# Altium PCB 03按键.PcbDoc (part 2 of 3)
Units mil, origin at the board's own origin, x right, y up, seen from the top; angles counter-clockwise.
Board outline 1673 x 1444 mil, 2 copper layers (Top Layer, Bottom Layer); 1 components, 7 nets, 11 pads, 20 vias.
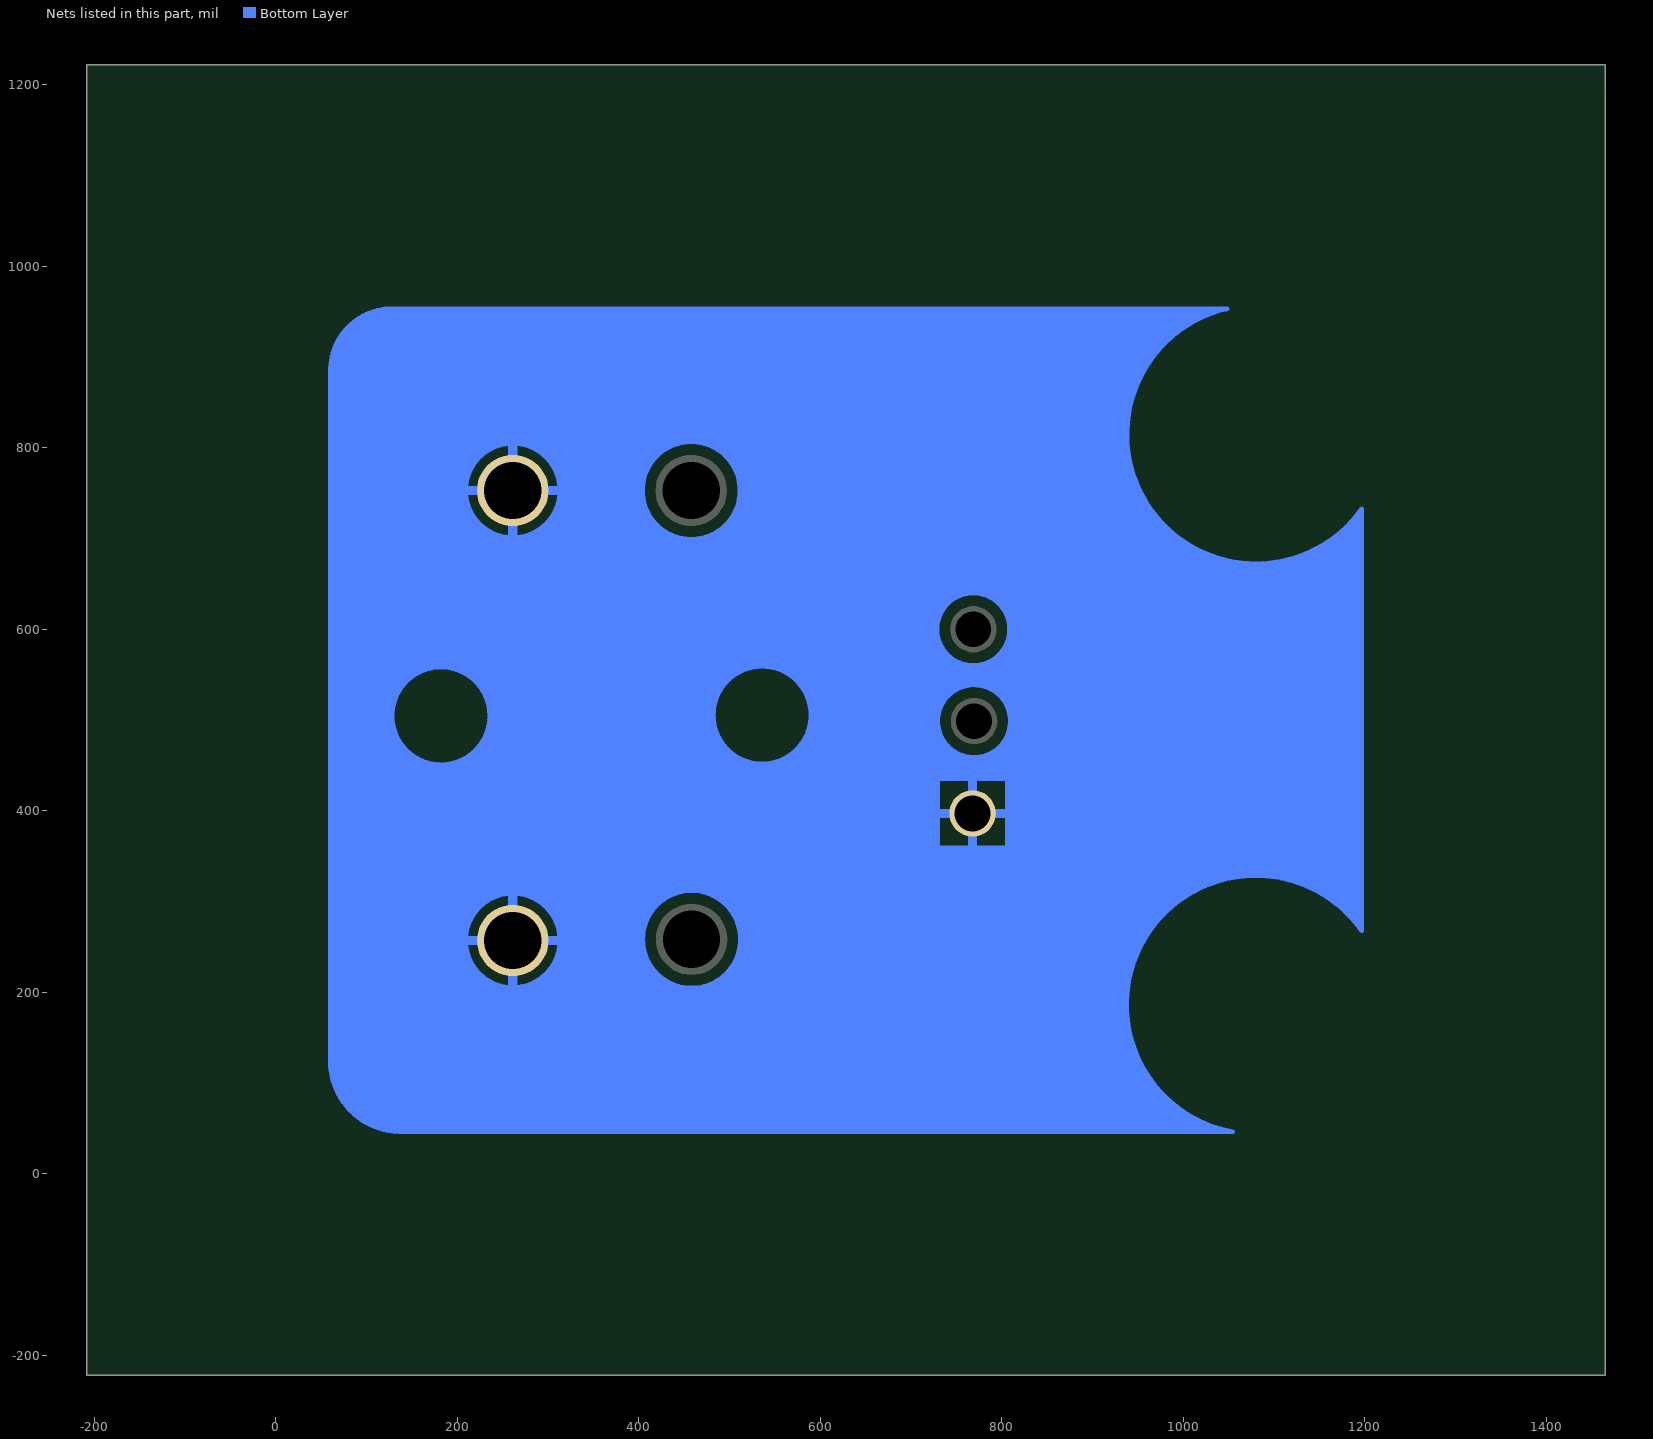
[diagram p2: the nets of this part, all layers, seen from the top]

## Via types
v1: diameter 40, hole 40, Top Layer to Bottom Layer, 16 vias
v2: diameter 255.91, hole 129.92, Top Layer to Bottom Layer, 2 vias
v3: diameter 78.74, hole 78.74, Top Layer to Bottom Layer, 2 vias

## Nets (pads, with @x,y where several pads share a name; then routed paths per layer and width w, separated by ;. In a path a pad name is that pad's centre, name@x,y a point inside that pad or via, vN(x,y) a via of type N, cw(c..) or ccw(c..) an arc to the next point about the centre after c; other vN are vias at no path point) (continued)
$Net0: (continued)
  Bottom Layer w5: 60.26,124.21 60.43,118.8 60.98,113.42 61.9,108.08 63.19,102.83 64.85,97.67 66.86,92.65 69.21,87.78 71.9,83.08 74.92,78.58 78.23,74.31 81.84,70.27 85.72,66.5 89.86,63.01 94.22,59.81 98.8,56.93 103.58,54.37 108.51,52.15 113.59,50.29 118.79,48.78 124.08,47.63 129.44,46.86 134.83,46.47 137.54,46.41 ; 60.26,124.68 60.26,885.37 ; 60.26,125.02 951.67,125.02 ; 60.26,129.02 949.83,129.02 ; 60.26,133.02 948.14,133.02 ; 60.26,137.02 946.59,137.02 ; 60.26,141.02 945.18,141.02 ; 60.26,145.02 943.9,145.02 ; 60.26,149.02 942.75,149.02 ; 60.26,153.02 941.73,153.02 ; 60.26,157.02 940.82,157.02 ; 60.26,161.02 940.04,161.02 ; 60.26,165.02 939.37,165.02 ; 60.26,169.02 938.82,169.02 ; 60.26,173.02 938.39,173.02 ; 60.26,177.02 938.07,177.02 ; 60.26,181.02 937.86,181.02 ; 60.26,185.02 937.77,185.02 ; 60.26,189.02 937.79,189.02 ; 60.26,193.02 937.92,193.02 ; 60.26,197.02 938.16,197.02 ; 60.26,201.02 938.52,201.02 ; 60.26,205.02 452.85,205.02 ; 60.26,209.02 242.03,209.02 ; 60.26,213.02 234.08,213.02 ; 60.26,217.02 228.46,217.02 ; 60.26,221.02 224.1,221.02 ; 60.26,225.02 220.59,225.02 ; 60.26,229.02 217.72,229.02 ; 60.26,233.02 215.38,233.02 ; 60.26,237.02 213.49,237.02 ; 60.26,241.02 211.99,241.02 ; 60.26,245.02 210.86,245.02 ; 60.26,249.02 210.06,249.02 ; 60.26,253.02 209.58,253.02 ; 60.26,257.02 209.41,257.02 ; 60.26,261.02 209.55,261.02 ; 60.26,265.02 210,265.02 ; 60.26,269.02 210.78,269.02 ; 60.26,273.02 211.88,273.02 ; 60.26,277.02 213.35,277.02 ; 60.26,281.02 215.21,281.02 ; 60.26,285.02 217.51,285.02 ; 60.26,289.02 220.33,289.02 ; 60.26,293.02 223.78,293.02 ; 60.26,297.02 228.06,297.02 ; 60.26,301.02 233.55,301.02 ; 60.26,305.02 241.22,305.02 ; 60.26,309.02 259.32,309.02 ; 60.26,313.02 1015.23,313.02 ; 60.26,317.02 1023.73,317.02 ; 60.26,321.02 1034.12,321.02 ; 60.26,325.02 1048.18,325.02 ; 60.26,329.02 1196.66,329.02 ; 60.26,333.02 1196.66,333.02 ; 60.26,337.02 1196.66,337.02 ; 60.26,341.02 1196.66,341.02 ; 60.26,345.02 1196.66,345.02 ; 60.26,349.02 1196.66,349.02 ; 60.26,353.02 1196.66,353.02 ; 60.26,357.02 1196.66,357.02 ; 60.26,361.02 729.86,361.02 ; 60.26,365.02 729.86,365.02 ; 60.26,369.02 729.86,369.02 ; 60.26,373.02 729.86,373.02 ; 60.26,377.02 729.86,377.02 ; 60.26,381.02 729.86,381.02 ; 60.26,385.02 729.86,385.02 ; 60.26,389.02 729.86,389.02 ; 60.26,393.02 729.86,393.02 ; 60.26,397.02 729.86,397.02 ; 60.26,401.02 729.86,401.02 ; 60.26,405.02 729.86,405.02 ; 60.26,409.02 729.86,409.02 ; 60.26,413.02 729.86,413.02 ; 60.26,417.02 729.86,417.02 ; 60.26,421.02 729.86,421.02 ; 60.26,425.02 729.86,425.02 ; 60.26,429.02 729.86,429.02 ; 60.26,433.02 729.86,433.02 ; 60.26,437.02 1196.66,437.02 ; 60.26,441.02 1196.66,441.02 ; 60.26,445.02 1196.66,445.02 ; 60.26,449.02 1196.66,449.02 ; 60.26,453.02 167.55,453.02 ; 60.26,457.02 157.42,457.02 ; 60.26,461.02 150.89,461.02 ; 60.26,465.02 145.94,465.02 ; 60.26,469.02 141.99,469.02 ; 60.26,473.02 138.77,473.02 ; 60.26,477.02 136.11,477.02 ; 60.26,481.02 133.93,481.02 ; 60.26,485.02 132.16,485.02 ; 60.26,489.02 130.77,489.02 ; 60.26,493.02 129.71,493.02 ; 60.26,497.02 128.98,497.02 ; 60.26,501.02 128.56,501.02 ; 60.26,505.02 128.43,505.02 ; 60.26,509.02 128.61,509.02 ; 60.26,513.02 129.08,513.02 ; 60.26,517.02 129.87,517.02 ; 60.26,521.02 130.98,521.02 ; 60.26,525.02 132.43,525.02 ; 60.26,529.02 134.26,529.02 ; 60.26,533.02 136.52,533.02 ; 60.26,537.02 139.26,537.02 ; 60.26,541.02 142.59,541.02 ; 60.26,545.02 146.69,545.02 ; 60.26,549.02 151.84,549.02 ; 60.26,553.02 158.75,553.02 ; 60.26,557.02 170.16,557.02 ; 60.26,561.02 760.74,561.02 ; 60.26,565.02 749.77,565.02 ; 60.26,569.02 743.76,569.02 ; 60.26,573.02 739.48,573.02 ; 60.26,577.02 736.23,577.02 ; 60.26,581.02 733.74,581.02 ; 60.26,585.02 731.84,585.02 ; 60.26,589.02 730.45,589.02 ; 60.26,593.02 729.51,593.02 ; 60.26,597.02 729,597.02 ; 60.26,601.02 728.89,601.02 ; 60.26,605.02 729.18,605.02 ; 60.26,609.02 729.89,609.02 ; 60.26,613.02 731.03,613.02 ; 60.26,617.02 732.64,617.02 ; 60.26,621.02 734.8,621.02 ; 60.26,625.02 737.61,625.02 ; 60.26,629.02 741.28,629.02 ; 60.26,633.02 746.23,633.02 ; 60.26,637.02 753.64,637.02 ; 60.26,641.02 1196.66,641.02 ; 60.26,645.02 1196.66,645.02 ; 60.26,649.02 1196.66,649.02 ; 60.26,653.02 1196.66,653.02 ; 60.26,657.02 1196.66,657.02 ; 60.26,661.02 1196.66,661.02 ; 60.26,665.02 1196.66,665.02 ; 60.26,669.02 1196.66,669.02 ; 60.26,673.02 1067.32,673.02 ; 60.26,677.02 1044.53,677.02 ; 60.26,681.02 1031.71,681.02 ; 60.26,685.02 1021.89,685.02 ; 60.26,689.02 1013.73,689.02 ; 60.26,693.02 1006.69,693.02 ; 60.26,697.02 1000.46,697.02 ; 60.26,701.02 444.55,701.02 ; 60.26,705.02 241.59,705.02 ; 60.26,709.02 233.79,709.02 ; 60.26,713.02 228.24,713.02 ; 60.26,717.02 223.92,717.02 ; 60.26,721.02 220.44,721.02 ; 60.26,725.02 217.6,725.02 ; 60.26,729.02 215.28,729.02 ; 60.26,733.02 213.41,733.02 ; 60.26,737.02 211.92,737.02 ; 60.26,741.02 210.8,741.02 ; 60.26,745.02 210.02,745.02 ; 60.26,749.02 209.55,749.02 ; 60.26,753.02 209.4,753.02 ; 60.26,757.02 209.55,757.02 ; 60.26,761.02 210.02,761.02 ; 60.26,765.02 210.81,765.02 ; 60.26,769.02 211.93,769.02 ; 60.26,773.02 213.41,773.02 ; 60.26,777.02 215.29,777.02 ; 60.26,781.02 217.61,781.02 ; 60.26,785.02 220.45,785.02 ; 60.26,789.02 223.93,789.02 ; 60.26,793.02 228.26,793.02 ; 60.26,797.02 233.81,797.02 ; 60.26,801.02 241.63,801.02 ; 60.26,805.02 444.69,805.02 ; 60.26,809.02 938.28,809.02 ; 60.26,813.02 938.18,813.02 ; 60.26,817.02 938.19,817.02 ; 60.26,821.02 938.31,821.02 ; 60.26,825.02 938.55,825.02 ; 60.26,829.02 938.9,829.02 ; 60.26,833.02 939.36,833.02 ; 60.26,837.02 939.94,837.02 ; 60.26,841.02 940.63,841.02 ; 60.26,845.02 941.44,845.02 ; 60.26,849.02 942.38,849.02 ; 60.26,853.02 943.44,853.02 ; 60.26,857.02 944.62,857.02 ; 60.26,861.02 945.93,861.02 ; 60.26,865.02 947.38,865.02 ; 60.26,869.02 948.96,869.02 ; 60.26,873.02 950.68,873.02 ; 60.26,877.02 952.56,877.02 ; 60.26,881.02 954.59,881.02 ; 60.26,885.02 956.78,885.02 ; 60.26,885.59 60.27,886.81 60.54,891.55 61.13,896.26 62.06,900.92 63.3,905.51 64.87,909.99 66.74,914.36 68.91,918.58 71.38,922.65 74.12,926.53 77.12,930.21 80.37,933.67 83.86,936.9 87.56,939.88 91.47,942.59 95.55,945.02 ; 60.32,121.02 953.66,121.02 ; 60.36,889.02 959.14,889.02 ; 60.57,117.02 955.81,117.02 ; 60.69,893.02 961.69,893.02 ; 61.04,113.02 958.13,113.02 ; 61.26,897.02 964.42,897.02 ; 61.71,109.02 960.62,109.02 ; 62.08,901.02 967.37,901.02 ; 62.61,105.02 963.31,105.02 ; 63.16,905.02 970.54,905.02 ; 63.73,101.02 966.21,101.02 ; 63.95,100.33 63.95,907.47 ; 64.5,909.02 973.95,909.02 ; 65.09,97.02 969.32,97.02 ; 66.13,913.02 977.64,913.02 ; 66.7,93.02 972.67,93.02 ; 67.95,90.3 67.95,916.79 ; 68.07,917.02 981.62,917.02 ; 68.58,89.02 976.28,89.02 ; 70.34,921.02 985.93,921.02 ; 70.74,85.02 980.19,85.02 ; 71.94,83.02 71.94,923.5 ; 73,925.02 990.64,925.02 ; 73.23,81.02 984.42,81.02 ; 75.94,77.19 75.94,928.83 ; 76.08,77.02 989.02,77.02 ; 76.1,929.02 995.79,929.02 ; 79.33,73.02 994.05,73.02 ; 79.72,933.02 1001.48,933.02 ; 79.94,72.33 79.94,933.25 ; 83.08,69.02 999.6,69.02 ; 83.94,68.17 83.94,936.98 ; 84,937.02 1007.83,937.02 ; 87.41,65.02 1005.77,65.02 ; 87.94,64.56 87.94,940.16 ; 89.14,941.02 1015.04,941.02 ; 91.94,61.42 91.94,942.89 ; 92.5,61.02 1012.74,61.02 ; 95.95,58.68 95.95,945.24 ; 98.65,57.02 1020.79,57.02 ; 99.95,56.28 99.95,947.23 ; 103.95,54.19 103.95,948.92 ; 104.22,949.02 1033.63,949.02 ; 106.48,53.02 1030.45,53.02 ; 107.95,52.39 107.95,950.31 ; 111.95,50.85 111.95,951.43 ; 115.94,49.56 115.94,952.3 ; 117.86,49.02 1042.95,49.02 ; 119.94,48.5 119.94,952.91 ; 120.86,953.02 1047.26,953.02 ; 123.94,47.66 123.94,953.29 ; 127.39,953.42 122.64,953.19 117.93,952.63 113.26,951.74 108.67,950.53 104.17,949 99.79,947.16 95.55,945.02 ; 127.95,47.04 127.95,953.4 ; 128.32,953.4 1048.88,953.4 1039.28,950.86 1029.88,947.66 1020.73,943.81 1011.87,939.33 1003.34,934.24 995.19,928.57 987.45,922.35 980.17,915.6 973.37,908.36 967.1,900.66 961.37,892.54 956.23,884.05 951.7,875.21 947.79,866.09 944.52,856.71 941.92,847.12 940,837.38 938.76,827.53 938.21,817.62 938.35,807.69 939.18,797.79 940.7,787.98 942.91,778.3 945.78,768.79 949.31,759.51 953.48,750.5 958.26,741.8 963.64,733.45 969.59,725.5 976.08,717.99 983.08,710.94 990.56,704.41 998.47,698.4 1006.78,692.97 1015.45,688.13 1024.43,683.9 1033.69,680.31 1043.18,677.38 1052.85,675.12 1062.65,673.53 1072.54,672.63 1082.47,672.43 1092.39,672.92 1102.25,674.1 1112,675.96 1121.6,678.5 1131,681.7 1140.15,685.55 1149.01,690.03 1157.54,695.12 1165.69,700.79 1173.43,707.01 1180.71,713.76 1187.51,721 ; 131.94,46.63 131.94,485.58 ; 131.94,523.79 131.94,953.4 ; 135.95,46.43 135.95,477.3 ; 135.95,532.08 135.95,953.4 ; 137.8,46.41 1054.49,46.41 1052.72,46.75 1043.05,49 1033.56,51.91 1024.29,55.48 1015.29,59.69 1006.62,64.51 998.29,69.93 990.37,75.92 982.89,82.44 975.87,89.47 969.37,96.97 963.4,104.91 958,113.24 953.2,121.93 949.01,130.94 945.46,140.21 942.57,149.71 940.35,159.39 938.81,169.2 937.95,179.09 937.79,189.02 ; 139.95,46.41 139.95,471.47 ; 139.95,537.91 139.95,953.4 ; 143.94,46.41 143.94,466.94 ; 143.94,542.43 143.94,953.4 ; 147.95,46.41 147.95,463.28 ; 147.95,546.09 147.95,953.4 ; 151.94,46.41 151.94,460.28 ; 151.94,549.09 151.94,953.4 ; 155.95,46.41 155.95,457.81 ; 155.95,551.56 155.95,953.4 ; 159.94,46.41 159.94,455.8 ; 159.94,553.58 159.94,953.4 ; 163.95,46.41 163.95,454.17 ; 163.95,555.2 163.95,953.4 ; 167.94,46.41 167.94,452.91 ; 167.94,556.46 167.94,953.4 ; 171.95,46.41 171.95,451.98 ; 171.95,557.39 171.95,953.4 ; 175.94,46.41 175.94,451.36 ; 175.94,558.01 175.94,953.4 ; 179.95,46.41 179.95,451.05 ; 179.95,558.32 179.95,953.4 ; 183.95,46.41 183.95,451.04 ; 183.95,558.34 183.95,953.4 ; 187.94,46.41 187.94,451.32 ; 187.94,558.05 187.94,953.4 ; 191.95,46.41 191.95,451.91 ; 191.95,557.46 191.95,953.4 ; 194.07,557.02 520.99,557.02 ; 195.94,46.41 195.94,452.82 ; 195.94,556.55 195.94,953.4 ; 196.68,453.02 524.79,453.02 ; 199.95,46.41 199.95,454.05 ; 199.95,555.32 199.95,953.4 ; 203.94,46.41 203.94,455.64 ; 203.94,553.73 203.94,953.4 ; 205.47,553.02 511.1,553.02 ; 206.8,457.02 513.02,457.02 ; 207.95,46.41 207.95,457.63 ; 207.95,551.74 207.95,953.4 ; 211.94,46.41 211.94,241.16 ; 211.94,273.21 211.94,460.06 ; 211.94,549.31 211.94,736.96 ; 211.94,769.06 211.94,953.4 ; 212.38,549.02 504.64,549.02 ; 213.34,461.02 506.02,461.02 ; 215.95,46.41 215.95,231.98 ; 215.95,282.39 215.95,463.01 ; 215.95,546.36 215.95,727.79 ; 215.95,778.23 215.95,953.4 ; 217.54,545.02 499.74,545.02 ; 218.28,465.02 500.82,465.02 ; 219.94,46.41 219.94,225.85 ; 219.94,288.52 219.94,466.6 ; 219.94,542.77 219.94,721.66 ; 219.94,784.36 219.94,953.4 ; 221.63,541.02 495.82,541.02 ; 222.23,469.02 496.69,469.02 ; 223.95,46.41 223.95,221.18 ; 223.95,471.05 223.95,293.2 ; 223.95,538.33 223.95,716.99 ; 223.95,953.4 223.95,789.03 ; 224.96,537.02 492.62,537.02 ; 225.46,473.02 493.33,473.02 ; 227.71,533.02 489.98,533.02 ; 227.94,46.41 227.94,217.45 ; 227.94,296.93 227.94,476.74 ; 227.94,532.63 227.94,713.26 ; 227.94,792.76 227.94,953.4 ; 228.11,477.02 490.57,477.02 ; 229.96,529.02 487.81,529.02 ; 230.29,481.02 488.3,481.02 ; 231.79,525.02 486.06,525.02 ; 231.94,46.41 231.94,214.41 ; 231.94,299.96 231.94,484.73 ; 231.94,524.64 231.94,710.22 ; 231.94,795.8 231.94,953.4 ; 232.06,485.02 486.45,485.02 ; 233.25,521.02 484.68,521.02 ; 233.46,489.02 484.98,489.02 ; 234.36,517.02 483.64,517.02 ; 234.51,493.02 483.86,493.02 ; 235.14,513.02 482.92,513.02 ; 235.24,497.02 483.06,497.02 ; 235.62,509.02 482.5,509.02 ; 235.67,501.02 482.58,501.02 ; 235.79,505.02 482.39,505.02 ; 235.95,46.41 235.95,211.92 ; 235.95,302.45 235.95,707.74 ; 235.95,798.28 235.95,953.4 ; 239.94,46.41 239.94,209.91 ; 239.94,304.47 239.94,705.73 ; 239.94,800.29 239.94,953.4 ; 243.95,46.41 243.95,208.3 ; 243.95,306.07 243.95,704.12 ; 243.95,801.9 243.95,953.4 ; 247.94,46.41 247.94,207.06 ; 247.94,307.31 247.94,702.88 ; 247.94,803.14 247.94,953.4 ; 251.94,46.41 251.94,206.16 ; 251.94,308.21 251.94,701.99 ; 251.94,804.04 251.94,953.4 ; 255.94,46.41 255.94,205.59 ; 255.94,308.78 255.94,701.41 ; 255.94,804.61 255.94,953.4 ; 259.95,46.41 259.95,205.33 ; 259.95,309.04 259.95,701.16 ; 259.95,804.86 259.95,953.4 ; 263.24,309.02 440.44,309.02 ; 263.95,46.41 263.95,205.38 ; 263.95,308.99 263.95,701.21 ; 263.95,804.81 263.95,953.4 ; 267.94,46.41 267.94,205.75 ; 267.94,308.63 267.94,701.57 ; 267.94,804.45 267.94,953.4 ; 271.94,46.41 271.94,206.42 ; 271.94,307.95 271.94,702.25 ; 271.94,803.77 271.94,953.4 ; 275.95,46.41 275.95,207.43 ; 275.95,306.94 275.95,703.26 ; 275.95,802.76 275.95,953.4 ; 279.94,46.41 279.94,208.79 ; 279.94,305.58 279.94,704.62 ; 279.94,801.4 279.94,953.4 ; 280.53,209.02 437.35,209.02 ; 280.91,801.02 433.95,801.02 ; 280.95,705.02 433.87,705.02 ; 281.34,305.02 431.72,305.02 ; 283.94,46.41 283.94,210.53 ; 283.94,303.84 283.94,706.36 ; 283.94,799.66 283.94,953.4 ; 287.95,46.41 287.95,212.7 ; 287.95,301.68 287.95,708.53 ; 287.95,797.5 287.95,953.4 ; 288.48,213.02 429.71,213.02 ; 288.72,797.02 427.22,797.02 ; 288.75,709.02 427.17,709.02 ; 289.01,301.02 425.7,301.02 ; 291.95,46.41 291.95,215.35 ; 291.95,299.02 291.95,711.18 ; 291.95,794.84 291.95,953.4 ; 294.1,217.02 424.19,217.02 ; 294.3,713.02 422.13,713.02 ; 294.28,793.02 422.17,793.02 ; 294.5,297.02 421.06,297.02 ; 295.94,46.41 295.94,218.6 ; 295.94,295.77 295.94,714.43 ; 295.94,791.59 295.94,953.4 ; 298.46,221.02 419.85,221.02 ; 298.6,789.02 418.14,789.02 ; 298.78,293.02 417.32,293.02 ; 299.94,46.41 299.94,222.61 ; 299.94,291.76 299.94,718.45 ; 299.94,787.57 299.94,953.4 ; 301.97,225.02 416.33,225.02 ; 302.1,721.02 414.83,721.02 ; 302.09,785.02 414.86,785.02 ; 302.23,289.02 414.26,289.02 ; 303.95,46.41 303.95,227.69 ; 303.95,286.68 303.95,723.53 ; 303.95,782.49 303.95,953.4 ; 304.83,229.02 413.44,229.02 ; 304.94,725.02 412.13,725.02 ; 304.93,781.02 412.16,781.02 ; 305.05,285.02 411.73,285.02 ; 307.18,233.02 411.07,233.02 ; 307.26,729.02 409.92,729.02 ; 307.25,777.02 409.94,777.02 ; 307.35,281.02 409.67,281.02 ; 307.95,46.41 307.95,234.54 ; 307.95,279.83 307.95,730.39 ; 307.95,775.63 307.95,953.4 ; 309.07,237.02 409.13,237.02 ; 309.13,733.02 408.12,733.02 ; 309.13,773.02 408.14,773.02 ; 309.21,277.02 408.01,277.02 ; 310.56,241.02 407.58,241.02 ; 310.61,737.02 406.7,737.02 ; 310.61,769.02 406.71,769.02 ; 310.67,273.02 406.7,273.02 ; 311.7,245.02 406.38,245.02 ; 311.73,741.02 405.62,741.02 ; 311.73,765.02 405.63,765.02 ; 311.78,269.02 405.74,269.02 ; 311.94,46.41 311.94,246.08 ; 311.94,268.3 311.94,741.94 ; 311.94,764.08 311.94,953.4 ; 312.5,249.02 405.51,249.02 ; 312.52,745.02 404.86,745.02 ; 312.52,761.02 404.87,761.02 ; 312.55,265.02 405.09,265.02 ; 312.98,253.02 404.95,253.02 ; 313.01,261.02 404.74,261.02 ; 312.99,749.02 404.41,749.02 ; 312.98,757.02 404.41,757.02 ; 313.15,257.02 404.7,257.02 ; 315.94,46.41 315.94,953.4 ; 319.95,46.41 319.95,953.4 ; 323.94,46.41 323.94,953.4 ; 327.94,46.41 327.94,953.4 ; 331.95,46.41 331.95,953.4 ; 335.95,46.41 335.95,953.4 ; 339.94,46.41 339.94,953.4 ; 343.94,46.41 343.94,953.4 ; 347.95,46.41 347.95,953.4 ; 351.95,46.41 351.95,953.4 ; 355.94,46.41 355.94,953.4 ; 359.94,46.41 359.94,953.4 ; 363.95,46.41 363.95,953.4 ; 367.94,46.41 367.94,953.4 ; 371.94,46.41 371.94,953.4 ; 375.95,46.41 375.95,953.4 ; 379.95,46.41 379.95,953.4 ; 383.94,46.41 383.94,953.4 ; 387.94,46.41 387.94,953.4 ; 391.95,46.41 391.95,953.4 ; 395.95,46.41 395.95,953.4 ; 399.94,46.41 399.94,953.4 ; 403.94,46.41 403.94,953.4 ; 407.95,46.41 407.95,239.98 ; 407.95,276.85 407.95,733.47 ; 407.95,772.54 407.95,953.4 ; 411.94,46.41 411.94,231.45 ; 411.94,285.38 411.94,725.33 ; 411.94,780.67 411.94,953.4 ; 415.94,46.41 415.94,225.51 ; 415.94,291.32 415.94,719.57 ; 415.94,786.43 415.94,953.4 ; 418.11,717.02 298.62,717.02 ; 419.95,46.41 419.95,220.92 ; 419.95,295.91 419.95,715.09 ; 419.95,790.92 419.95,953.4 ; 423.95,46.41 423.95,217.22 ; 423.95,299.61 423.95,711.46 ; 423.95,794.54 423.95,953.4 ; 427.94,46.41 427.94,214.18 ; 427.94,302.65 427.94,708.49 ; 427.94,953.4 427.94,797.52 ; 431.94,46.41 431.94,211.69 ; 431.94,305.15 431.94,706.04 ; 431.94,799.97 431.94,953.4 ; 435.95,46.41 435.95,209.64 ; 435.95,307.19 435.95,704.03 ; 435.95,801.97 435.95,953.4 ; 439.95,46.41 439.95,207.99 ; 439.95,308.84 439.95,702.43 ; 439.95,803.57 439.95,953.4 ; 443.94,46.41 443.94,206.71 ; 443.94,310.13 443.94,701.18 ; 443.94,804.82 443.94,953.4 ; 447.94,46.41 447.94,205.76 ; 447.94,311.08 447.94,700.26 ; 447.94,805.74 447.94,953.4 ; 451.95,46.41 451.95,205.12 ; 451.95,311.71 451.95,699.66 ; 451.95,806.35 451.95,953.4 ; 455.94,46.41 455.94,204.79 ; 455.94,312.04 455.94,699.36 ; 455.94,806.64 455.94,953.4 ; 459.94,46.41 459.94,204.76 ; 459.94,312.07 459.94,699.36 ; 459.94,806.64 459.94,953.4 ; 463.87,205.02 938.99,205.02 ; 463.95,46.41 463.95,205.03 ; 463.95,699.66 463.95,311.81 ; 463.95,806.35 463.95,953.4 ; 467.95,46.41 467.95,205.6 ; 467.95,311.24 467.95,700.26 ; 467.95,805.74 467.95,953.4 ; 471.2,805.02 938.5,805.02 ; 471.34,701.02 994.87,701.02 ; 471.94,46.41 471.94,206.48 ; 471.94,310.35 471.94,701.18 ; 471.94,804.82 471.94,953.4 ; 475.94,46.41 475.94,207.7 ; 475.94,309.14 475.94,702.43 ; 475.94,803.57 475.94,953.4 ; 476.28,309.02 1007.95,309.02 1007.94,692.27 ; 479.37,209.02 939.58,209.02 ; 479.95,46.41 479.95,209.27 ; 479.95,307.57 479.95,704.03 ; 479.95,801.97 479.95,953.4 ; 481.94,801.02 938.83,801.02 ; 482.02,705.02 989.8,705.02 ; 483.95,46.41 483.95,211.23 ; 483.95,305.61 483.95,492.67 ; 483.95,518.33 483.95,706.04 ; 483.95,799.97 483.95,953.4 ; 485,305.02 1001.54,305.02 ; 487.01,213.02 940.28,213.02 ; 487.94,46.41 487.94,213.62 ; 487.94,303.21 487.94,481.72 ; 487.94,529.28 487.94,708.49 ; 487.94,953.4 487.94,797.52 ; 488.67,797.02 939.27,797.02 ; 488.72,709.02 985.17,709.02 ; 491.02,301.02 995.8,301.02 ; 491.94,46.41 491.94,216.54 ; 491.94,300.29 491.94,474.93 ; 491.94,536.07 491.94,711.46 ; 491.94,794.54 491.94,953.4 ; 492.53,217.02 941.1,217.02 ; 493.76,713.02 980.91,713.02 ; 493.73,793.02 939.83,793.02 ; 495.66,297.02 990.61,297.02 ; 495.95,46.41 495.95,220.09 ; 495.95,296.75 495.95,469.84 ; 495.95,541.16 495.95,715.09 ; 495.95,790.92 495.95,953.4 ; 496.87,221.02 942.05,221.02 ; 497.75,789.02 940.5,789.02 ; 497.78,717.02 976.98,717.02 ; 499.4,293.02 985.88,293.02 ; 499.95,46.41 499.95,224.47 ; 499.95,292.37 499.95,465.79 ; 499.95,545.21 499.95,719.57 ; 499.95,786.43 499.95,953.4 ; 500.39,225.02 943.11,225.02 ; 501.06,721.02 973.35,721.02 ; 501.03,785.02 941.3,785.02 ; 502.47,289.02 981.53,289.02 ; 503.28,229.02 944.31,229.02 ; 503.76,725.02 969.98,725.02 ; 503.73,781.02 942.21,781.02 ; 503.94,46.41 503.94,230.07 ; 503.94,286.77 503.94,462.49 ; 503.94,548.51 503.94,725.33 ; 503.94,780.67 503.94,953.4 ; 504.99,285.02 977.52,285.02 ; 505.65,233.02 945.63,233.02 ; 505.97,729.02 966.85,729.02 ; 505.95,777.02 943.25,777.02 ; 507.05,281.02 973.82,281.02 ; 507.59,237.02 947.08,237.02 ; 507.77,733.02 963.94,733.02 963.94,268.61 ; 507.75,773.02 944.41,773.02 ; 507.95,46.41 507.95,237.85 ; 507.95,278.99 507.95,459.78 ; 507.95,551.23 507.95,733.47 ; 507.95,772.54 507.95,953.4 ; 508.72,277.02 970.39,277.02 ; 509.15,241.02 948.68,241.02 ; 509.19,737.02 961.24,737.02 ; 509.18,769.02 945.7,769.02 ; 510.02,273.02 967.2,273.02 ; 510.27,741.02 958.72,741.02 ; 510.26,765.02 947.12,765.02 ; 510.34,245.02 950.42,245.02 ; 510.99,269.02 964.23,269.02 ; 511.02,761.02 948.68,761.02 ; 511.03,745.02 956.39,745.02 ; 511.21,249.02 952.3,249.02 ; 511.48,749.02 954.23,749.02 ; 511.48,757.02 950.38,757.02 ; 511.64,265.02 961.48,265.02 ; 511.77,253.02 954.34,253.02 ; 511.95,46.41 511.95,255.19 ; 511.95,261.64 511.95,457.55 ; 511.95,553.46 511.95,953.4 ; 512.02,257.02 956.55,257.02 ; 511.98,261.02 958.92,261.02 ; 515.95,46.41 515.95,455.73 ; 515.95,953.4 515.95,555.27 ; 519.95,46.41 519.95,454.3 ; 519.95,556.7 519.95,953.4 ; 523.94,46.41 523.94,453.21 ; 523.94,557.79 523.94,953.4 ; 527.94,46.41 527.94,452.44 ; 527.94,558.56 527.94,953.4 ; 531.94,46.41 531.94,451.98 ; 531.94,559.02 531.94,953.4 ; 535.94,46.41 535.94,451.82 ; 535.94,559.18 535.94,953.4 ; 539.95,46.41 539.95,451.96 ; 539.95,559.04 539.95,953.4 ; 543.95,46.41 543.95,452.4 ; 543.95,558.6 543.95,953.4 ; 547.35,453.02 1196.66,453.02 ; 547.95,46.41 547.95,453.15 ; 547.95,557.85 547.95,953.4 ; 551.15,557.02 1196.66,557.02 ; 551.94,46.41 551.94,454.22 ; 551.94,556.78 551.94,953.4 ; 555.94,46.41 555.94,455.64 ; 555.94,555.37 555.94,953.4 ; 559.12,457.02 1196.66,457.02 ; 559.94,46.41 559.94,457.42 ; 559.94,553.58 559.94,953.4 ; 561.04,553.02 1196.66,553.02 ; 563.94,46.41 563.94,459.63 ; 563.94,551.38 563.94,953.4 ; 567.5,549.02 1196.66,549.02 ; 567.95,46.41 567.95,462.31 ; 567.95,548.69 567.95,953.4 ; 571.32,465.02 748.46,465.02 ; 571.95,46.41 571.95,465.57 ; 571.95,545.43 571.95,953.4 ; 572.4,545.02 1196.66,545.02 ; 575.45,469.02 743.11,469.02 ; 575.95,46.41 575.95,469.56 ; 575.95,541.44 575.95,953.4 ; 576.32,541.02 1196.66,541.02 ; 578.81,473.02 739.2,473.02 ; 579.52,537.02 757.97,537.02 ; 579.95,46.41 579.95,474.57 ; 579.95,536.43 579.95,953.4 ; 581.57,477.02 736.21,477.02 ; 582.16,533.02 749,533.02 ; 583.84,481.02 733.92,481.02 ; 583.94,46.41 583.94,481.22 ; 583.94,529.78 583.94,953.4 ; 584.33,529.02 743.49,529.02 ; 585.69,485.02 732.19,485.02 ; 586.08,525.02 739.49,525.02 ; 587.16,489.02 730.94,489.02 ; 587.46,521.02 736.43,521.02 ; 587.94,46.41 587.94,491.69 ; 587.94,519.31 587.94,953.4 ; 588.28,493.02 730.14,493.02 ; 588.5,517.02 734.09,517.02 ; 589.08,497.02 729.75,497.02 ; 589.22,513.02 732.31,513.02 ; 589.56,501.02 729.77,501.02 ; 589.64,509.02 731.03,509.02 ; 589.75,505.02 730.19,505.02 ; 591.94,46.41 591.94,953.4 ; 595.95,46.41 595.95,953.4 ; 599.95,46.41 599.95,953.4 ; 603.95,46.41 603.95,953.4 ; 607.95,46.41 607.95,953.4 ; 611.94,46.41 611.94,953.4 ; 615.94,46.41 615.94,953.4 ; 619.94,46.41 619.94,953.4 ; 623.94,46.41 623.94,953.4 ; 627.95,46.41 627.95,953.4 ; 631.95,46.41 631.95,953.4 ; 635.95,46.41 635.95,953.4 ; 639.94,46.41 639.94,953.4 ; 643.94,46.41 643.94,953.4 ; 647.94,46.41 647.94,953.4 ; 651.94,46.41 651.94,953.4 ; 655.95,46.41 655.95,953.4 ; 659.95,46.41 659.95,953.4 ; 663.95,46.41 663.95,953.4 ; 667.95,46.41 667.95,953.4 ; 671.94,46.41 671.94,953.4 ; 675.94,46.41 675.94,953.4 ; 679.94,46.41 679.94,953.4 ; 683.95,46.41 683.95,953.4 ; 687.95,46.41 687.95,953.4 ; 691.95,46.41 691.95,953.4 ; 695.95,46.41 695.95,953.4 ; 699.94,46.41 699.94,953.4 ; 703.94,46.41 703.94,953.4 ; 707.94,46.41 707.94,953.4 ; 711.94,46.41 711.94,953.4 ; 715.95,46.41 715.95,953.4 ; 719.95,46.41 719.95,953.4 ; 723.95,46.41 723.95,953.4 ; 727.95,46.41 727.95,953.4 ; 731.94,46.41 731.94,359.1 ; 731.94,435.29 731.94,485.69 ; 731.94,512.02 731.94,584.76 ; 731.94,615.45 731.94,953.4 ; 735.94,46.41 735.94,359.1 ; 735.94,435.29 735.94,477.43 ; 735.94,520.27 735.94,577.43 ; 735.94,622.78 735.94,953.4 ; 739.94,46.41 739.94,359.1 ; 739.94,435.29 739.94,472.17 ; 739.94,525.53 739.94,572.52 ; 739.94,627.68 739.94,953.4 ; 743.95,46.41 743.95,359.1 ; 743.95,435.29 743.95,468.3 ; 743.95,529.4 743.95,568.87 ; 743.95,631.33 743.95,953.4 ; 747.95,46.41 747.95,359.1 ; 747.95,435.29 747.95,465.35 ; 747.95,532.36 747.95,566.07 ; 747.95,634.13 747.95,953.4 ; 751.95,46.41 751.95,359.1 ; 751.95,435.29 751.95,463.08 ; 751.95,534.63 751.95,563.93 ; 751.95,636.28 751.95,953.4 ; 755.95,46.41 755.95,359.1 ; 755.95,435.29 755.95,461.36 ; 755.95,536.34 755.95,562.32 ; 755.95,637.88 755.95,953.4 ; 756.93,461.02 566.12,461.02 ; 759.94,46.41 759.94,359.1 ; 759.94,435.29 759.94,460.14 ; 759.94,561.19 759.94,537.56 ; 759.94,639.01 759.94,953.4 ; 763.94,46.41 763.94,359.1 ; 763.94,435.29 763.94,459.35 ; 763.94,538.35 763.94,560.49 ; 763.94,639.71 763.94,953.4 ; 767.94,46.41 767.94,359.1 ; 767.94,435.29 767.94,458.99 ; 767.94,538.72 767.94,560.21 ; 767.94,639.99 767.94,953.4 ; 771.94,46.41 771.94,359.1 ; 771.94,435.29 771.94,459.02 ; 771.94,538.69 771.94,560.33 ; 771.94,639.88 771.94,953.4 ; 775.95,46.41 775.95,359.1 ; 775.95,435.29 775.95,459.46 ; 775.95,538.25 775.95,560.85 ; 775.95,639.36 775.95,953.4 ; 776.82,561.02 1196.66,561.02 ; 779.95,46.41 779.95,359.1 ; 779.95,435.29 779.95,460.31 ; 779.95,537.39 779.95,561.79 ; 779.95,638.41 779.95,953.4 ; 781.25,537.02 1196.66,537.02 ; 782.29,461.02 1196.66,461.02 ; 783.92,637.02 1196.66,637.02 ; 783.95,46.41 783.95,359.1 ; 783.95,435.29 783.95,461.61 ; 783.95,536.09 783.95,563.19 ; 783.95,637.01 783.95,953.4 ; 787.79,565.02 1196.66,565.02 ; 787.94,46.41 787.94,359.1 ; 787.94,435.29 787.94,463.41 ; 787.94,534.29 787.94,565.11 ; 787.94,635.1 787.94,953.4 ; 790.22,533.02 1196.66,533.02 ; 790.76,465.02 1196.66,465.02 ; 791.33,633.02 1196.66,633.02 ; 791.94,46.41 791.94,359.1 ; 791.94,435.29 791.94,465.79 ; 791.94,531.92 791.94,567.61 ; 791.94,632.59 791.94,953.4 ; 793.8,569.02 1196.66,569.02 ; 795.73,529.02 1196.66,529.02 ; 795.94,46.41 795.94,359.1 ; 795.94,435.29 795.94,468.87 ; 795.94,528.83 795.94,570.88 ; 795.94,629.33 795.94,953.4 ; 796.11,469.02 1196.66,469.02 ; 796.27,629.02 1196.66,629.02 ; 798.08,573.02 1196.66,573.02 ; 799.74,525.02 1196.66,525.02 ; 799.94,46.41 799.94,359.1 ; 799.94,435.29 799.94,472.93 ; 799.94,524.78 799.94,575.19 ; 799.94,953.4 799.94,625.02 1196.66,625.02 ; 800.02,473.02 1196.66,473.02 ; 801.33,577.02 1196.66,577.02 ; 802.76,621.02 1196.66,621.02 ; 802.79,521.02 1196.66,521.02 ; 803.01,477.02 1196.66,477.02 ; 803.82,581.02 1196.66,581.02 ; 803.95,46.41 803.95,359.1 ; 803.95,435.29 803.95,478.52 ; 803.95,519.18 803.95,581.25 ; 803.95,618.96 803.95,953.4 ; 804.92,617.02 1196.66,617.02 ; 805.14,517.02 1196.66,517.02 ; 805.31,481.02 1196.66,481.02 ; 805.72,585.02 1196.66,585.02 ; 806.05,361.02 1196.66,361.02 ; 806.05,365.02 1196.66,365.02 ; 806.05,369.02 1196.66,369.02 ; 806.05,373.02 1196.66,373.02 ; 806.05,377.02 1196.66,377.02 ; 806.05,381.02 1196.66,381.02 ; 806.05,385.02 1196.66,385.02 ; 806.05,389.02 1196.66,389.02 ; 806.05,393.02 1196.66,393.02 ; 806.05,397.02 1196.66,397.02 ; 806.05,401.02 1196.66,401.02 ; 806.05,405.02 1196.66,405.02 ; 806.05,409.02 1196.66,409.02 ; 806.05,413.02 1196.66,413.02 ; 806.05,417.02 1196.66,417.02 ; 806.05,421.02 1196.66,421.02 ; 806.05,425.02 1196.66,425.02 ; 806.05,429.02 1196.66,429.02 ; 806.05,433.02 1196.66,433.02 ; 806.53,613.02 1196.66,613.02 ; 806.91,513.02 1196.66,513.02 ; 807.04,485.02 1196.66,485.02 ; 807.11,589.02 1196.66,589.02 ; 807.67,609.02 1196.66,609.02 ; 807.95,46.41 807.95,487.77 ; 807.95,509.93 807.95,592.48 ; 807.95,607.73 807.95,953.4 ; 808.05,593.02 1196.66,593.02 ; 808.2,509.02 1196.66,509.02 ; 808.28,489.02 1196.66,489.02 ; 808.38,605.02 1196.66,605.02 ; 808.56,597.02 1196.66,597.02 ; 808.67,601.02 1196.66,601.02 ; 809.03,505.02 1196.66,505.02 ; 809.09,493.02 1196.66,493.02 ; 809.47,497.02 1196.66,497.02 ; 809.45,501.02 1196.66,501.02 ; 811.95,46.41 811.95,953.4 ; 815.95,46.41 815.95,953.4 ; 819.94,46.41 819.94,953.4 ; 823.94,46.41 823.94,953.4 ; 827.94,46.41 827.94,953.4 ; 831.95,46.41 831.95,953.4 ; 835.95,46.41 835.95,953.4 ; 839.95,46.41 839.95,953.4 ; 843.95,46.41 843.95,953.4 ; 847.94,46.41 847.94,953.4 ; 851.94,46.41 851.94,953.4 ; 855.94,46.41 855.94,953.4 ; 859.94,46.41 859.94,953.4 ; 863.95,46.41 863.95,953.4 ; 867.95,46.41 867.95,953.4 ; 871.95,46.41 871.95,953.4 ; 875.94,46.41 875.94,953.4 ; 879.94,46.41 879.94,953.4 ; 883.94,46.41 883.94,953.4 ; 887.94,46.41 887.94,953.4 ; 891.95,46.41 891.95,953.4 ; 895.95,46.41 895.95,953.4 ; 899.95,46.41 899.95,953.4 ; 903.95,46.41 903.95,953.4 ; 907.94,46.41 907.94,953.4 ; 911.94,46.41 911.94,953.4 ; 915.94,46.41 915.94,953.4 ; 919.95,46.41 919.95,953.4 ; 923.95,46.41 923.95,953.4 ; 927.95,46.41 927.95,953.4 ; 931.95,46.41 931.95,953.4 ; 935.94,46.41 935.94,953.4 ; 939.94,46.41 939.94,161.53 ; 939.94,211.2 939.94,792.28 ; 939.94,837.07 939.94,953.4 ; 943.94,46.41 943.94,144.88 ; 943.94,227.85 943.94,774.56 ; 943.94,854.79 943.94,953.4 ; 947.94,46.41 947.94,133.51 ; 947.94,239.22 947.94,762.86 ; 947.94,866.5 947.94,953.4 ; 951.95,46.41 951.95,124.44 ; 951.95,248.29 951.95,753.61 ; 951.95,875.74 951.95,953.4 ; 952.23,753.02 511.63,753.02 ; 955.95,46.41 955.95,116.77 ; 955.95,255.96 955.95,745.82 ; 955.95,883.53 955.95,953.4 ; 959.95,46.41 959.95,110.08 ; 959.95,262.65 959.95,739.04 ; 959.95,890.31 959.95,953.4 ; 963.94,46.41 963.94,104.12 ; 963.94,896.34 963.94,953.4 ; 967.94,46.41 967.94,98.75 ; 967.94,273.98 967.94,727.59 ; 967.94,901.77 967.94,953.4 ; 971.94,46.41 971.94,93.86 ; 971.94,278.87 971.94,722.65 ; 971.94,906.7 971.94,953.4 ; 975.94,46.41 975.94,89.38 ; 975.94,283.35 975.94,718.13 ; 975.94,911.22 975.94,953.4 ; 979.95,46.41 979.95,85.26 ; 979.95,287.47 979.95,713.98 ; 979.95,915.38 979.95,953.4 ; 983.95,46.41 983.95,81.45 ; 983.95,291.28 983.95,710.14 ; 983.95,919.22 983.95,953.4 ; 987.95,46.41 987.95,77.92 ; 987.95,294.81 987.95,706.58 ; 987.95,922.77 987.95,953.4 ; 991.95,46.41 991.95,74.65 ; 991.95,298.08 991.95,703.28 ; 991.95,926.07 991.95,953.4 ; 995.94,46.41 995.94,71.61 ; 995.94,301.12 995.94,700.22 ; 995.94,929.13 995.94,953.4 ; 999.94,46.41 999.94,68.78 ; 999.94,303.95 999.94,697.37 ; 999.94,931.98 999.94,953.4 ; 1003.94,46.41 1003.94,66.15 ; 1003.94,306.58 1003.94,694.73 ; 1003.94,934.63 1003.94,953.4 ; 1007.94,46.41 1007.94,63.71 ; 1007.94,937.09 1007.94,953.4 ; 1011.95,46.41 1011.95,61.45 ; 1011.95,311.28 1011.95,689.98 ; 1011.95,939.37 1011.95,953.4 ; 1015.94,46.41 1015.94,59.35 ; 1015.94,313.38 1015.94,687.87 ; 1015.94,941.48 1015.94,953.4 ; 1019.95,46.41 1019.95,57.41 ; 1019.95,315.32 1019.95,685.91 ; 1019.95,943.44 1019.95,953.4 ; 1023.43,945.02 95.55,945.02 ; 1023.94,46.41 1023.94,55.62 ; 1023.94,317.11 1023.94,684.11 ; 1023.94,945.25 1023.94,953.4 ; 1027.95,46.41 1027.95,53.98 ; 1027.95,318.75 1027.95,682.45 ; 1027.95,946.9 1027.95,953.4 ; 1031.94,46.41 1031.94,52.47 ; 1031.94,320.26 1031.94,680.93 ; 1031.94,948.42 1031.94,953.4 ; 1035.95,46.41 1035.95,51.1 ; 1035.95,321.63 1035.95,679.55 ; 1035.95,949.81 1035.95,953.4 ; 1039.95,46.41 1039.95,49.86 ; 1039.95,322.87 1039.95,678.3 ; 1043.94,323.98 1043.94,677.17 ; 1047.95,324.97 1047.95,676.17 ; 1051.94,325.83 1051.94,675.29 ; 1055.95,326.58 1055.95,674.54 ; 1059.94,327.21 1059.94,673.9 ; 1063.95,327.72 1063.95,673.37 ; 1067.95,328.12 1067.95,672.96 ; 1071.94,328.4 1071.94,672.67 ; 1075.95,328.57 1075.95,672.48 ; 1079.94,328.63 1079.94,672.41 ; 1083.95,328.58 1083.95,672.46 ; 1087.94,328.41 1087.94,672.61 ; 1091.95,328.13 1091.95,672.88 ; 1093.55,673.02 1196.66,673.02 ; 1095.95,327.74 1095.95,673.26 ; 1099.94,327.23 1099.94,673.76 ; 1103.95,326.6 1103.95,674.37 ; 1107.94,325.86 1107.94,675.1 ; 1111.87,325.02 1196.66,325.02 ; 1111.95,325 1111.95,675.95 ; 1115.94,324.02 1115.94,676.92 ; 1116.34,677.02 1196.66,677.02 ; 1119.95,322.91 1119.95,678.01 ; 1123.94,321.68 1123.94,679.23 ; 1125.93,321.02 1196.66,321.02 ; 1127.94,320.32 1127.94,680.58 ; 1129.16,681.02 1196.66,681.02 ; 1131.95,318.82 1131.95,682.07 ; 1135.94,317.18 1135.94,683.69 ; 1136.32,317.02 1196.66,317.02 ; 1138.98,685.02 1196.66,685.02 ; 1139.95,315.39 1139.95,685.46 ; 1143.94,313.46 1143.94,687.38 ; 1144.82,313.02 1196.66,313.02 ; 1147.14,689.02 1196.66,689.02 ; 1147.95,311.37 1147.95,689.45 ; 1151.94,309.11 1151.94,691.69 ; 1152.1,309.02 1196.66,309.02 ; 1154.18,693.02 1196.66,693.02 ; 1155.94,306.68 1155.94,694.11 ; 1158.51,305.02 1196.66,305.02 ; 1159.95,304.06 1159.95,696.71 ; 1160.41,697.02 1196.66,697.02 ; 1163.94,301.24 1163.94,699.5 ; 1164.25,301.02 1196.66,301.02 ; 1166,701.02 1196.66,701.02 ; 1167.95,298.21 1167.95,702.51 ; 1169.44,297.02 1196.66,297.02 ; 1171.07,705.02 1196.66,705.02 ; 1171.94,294.95 1171.94,705.75 ; 1174.18,293.02 1196.66,293.02 ; 1175.7,709.02 1196.66,709.02 ; 1175.95,291.43 1175.95,709.24 ; 1178.52,289.02 1196.66,289.02 ; 1179.94,287.63 1179.94,713.01 1196.66,713.02 ; 1182.53,285.02 1196.66,285.02 ; 1183.88,717.02 1196.66,717.02 ; 1183.94,283.52 1183.94,717.08 ; 1186.23,281.02 1196.66,281.02 ; 1187.95,279.06 1187.95,721.51 ; 1189.66,277.02 1196.66,277.02 ; 1190.89,725.02 1196.66,725.02 ; 1191.94,274.19 1191.94,726.33 ; 1192.85,273.02 1196.66,273.02 ; 1195.95,268.84 1195.95,731.63 ; 1196.66,721.02 1187.52,721.02 ; 128.43,504.69 128.56,500.95 ; 128.43,504.69 128.56,508.43 ; 128.43,504.69 128.56,500.95 ; 128.43,504.69 128.56,508.43 ; 128.56,500.95 128.95,497.22 ; 128.56,500.95 128.95,497.22 ; 128.56,508.43 128.95,512.16 ; 128.56,508.43 128.95,512.16 ; 128.95,497.22 129.6,493.53 ; 128.95,497.22 129.6,493.53 ; 128.95,512.16 129.6,515.85 ; 128.95,512.16 129.6,515.85 ; 129.6,493.53 130.51,489.89 ; 129.6,493.53 130.51,489.89 ; 129.6,515.85 130.51,519.49 ; 129.6,515.85 130.51,519.49 ; 130.51,489.89 131.67,486.33 ; 130.51,489.89 131.67,486.33 ; 130.51,519.49 131.67,523.05 ; 130.51,519.49 131.67,523.05 ; 131.67,486.33 133.07,482.86 ; 131.67,486.33 133.07,482.86 ; 131.67,523.05 133.07,526.52 ; 131.67,523.05 133.07,526.52 ; 133.07,482.86 134.71,479.49 ; 133.07,482.86 134.71,479.49 ; 133.07,526.52 134.71,529.89 ; 133.07,526.52 134.71,529.89 ; 134.71,479.49 136.59,476.24 ; 134.71,479.49 136.59,476.24 ; 134.71,529.89 136.59,533.14 ; 134.71,529.89 136.59,533.14 ; 136.59,476.24 138.68,473.14 ; 136.59,476.24 138.68,473.14 ; 136.59,533.14 138.68,536.24 ; 136.59,533.14 138.68,536.24 ; 138.68,473.14 140.99,470.19 ; 138.68,473.14 140.99,470.19 ; 138.68,536.24 140.99,539.19 ; 138.68,536.24 140.99,539.19 ; 140.99,470.19 143.5,467.4 ; 140.99,470.19 143.5,467.4 ; 140.99,539.19 143.5,541.98 ; 140.99,539.19 143.5,541.98 ; 143.5,467.4 146.19,464.8 ; 143.5,467.4 146.19,464.8 ; 143.5,541.98 146.19,544.58 ; 143.5,541.98 146.19,544.58 ; 146.19,464.8 149.06,462.39 ; 146.19,464.8 149.06,462.39 ; 146.19,544.58 149.06,546.99 ; 146.19,544.58 149.06,546.99 ; 149.06,462.39 152.09,460.19 ; 149.06,462.39 152.09,460.19 ; 149.06,546.99 152.09,549.19 ; 149.06,546.99 152.09,549.19 ; 152.09,460.19 155.27,458.2 ; 152.09,460.19 155.27,458.2 ; 152.09,549.19 155.27,551.18 ; 152.09,549.19 155.27,551.18 ; 155.27,458.2 158.58,456.44 ; 155.27,458.2 158.58,456.44 ; 155.27,551.18 158.58,552.94 ; 155.27,551.18 158.58,552.94 ; 158.58,456.44 162,454.92 ; 158.58,456.44 162,454.92 ; 158.58,552.94 162,554.46 ; 158.58,552.94 162,554.46 ; 162,454.92 165.52,453.64 ; 162,454.92 165.52,453.64 ; 162,554.46 165.52,555.74 ; 162,554.46 165.52,555.74 ; 165.52,453.64 169.12,452.6 ; 165.52,453.64 169.12,452.6 ; 165.52,555.74 169.12,556.78 ; 165.52,555.74 169.12,556.78 ; 169.12,452.6 172.79,451.83 ; 169.12,452.6 172.79,451.83 ; 169.12,556.78 172.79,557.55 ; 169.12,556.78 172.79,557.55 ; 172.79,451.83 176.5,451.3 ; 172.79,451.83 176.5,451.3 ; 172.79,557.55 176.5,558.08 ; 172.79,557.55 176.5,558.08 ; 176.5,451.3 180.24,451.04 ; 176.5,451.3 180.24,451.04 ; 176.5,558.08 180.24,558.34 ; 176.5,558.08 180.24,558.34 ; 180.24,451.04 183.98,451.04 ; 180.24,451.04 183.98,451.04 ; 180.24,558.34 183.98,558.34 ; 180.24,558.34 183.98,558.34 ; 183.98,451.04 187.72,451.3 ; 183.98,451.04 187.72,451.3 ; 183.98,558.34 187.72,558.08 ; 183.98,558.34 187.72,558.08 ; 187.72,451.3 191.43,451.83 ; 187.72,451.3 191.43,451.83 ; 187.72,558.08 191.43,557.55 ; 187.72,558.08 191.43,557.55 ; 191.43,451.83 195.1,452.6 ; 191.43,451.83 195.1,452.6 ; 191.43,557.55 195.1,556.78 ; 191.43,557.55 195.1,556.78 ; 195.1,452.6 198.7,453.64 ; 195.1,452.6 198.7,453.64 ; 195.1,556.78 198.7,555.74 ; 195.1,556.78 198.7,555.74 ; 198.7,453.64 202.22,454.92 ; 198.7,453.64 202.22,454.92 ; 198.7,555.74 202.22,554.46 ; 198.7,555.74 202.22,554.46 ; 202.22,454.92 205.64,456.44 ; 202.22,454.92 205.64,456.44 ; 202.22,554.46 205.64,552.94 ; 202.22,554.46 205.64,552.94 ; 205.64,456.44 208.95,458.2 ; 205.64,456.44 208.95,458.2 ; 205.64,552.94 208.95,551.18 ; 205.64,552.94 208.95,551.18 ; 208.95,458.2 212.13,460.19 ; 208.95,458.2 212.13,460.19 ; 208.95,551.18 212.13,549.19 ; 208.95,551.18 212.13,549.19 ; 209.4,753.01 209.53,749.39 209.9,745.79 210.53,742.23 211.41,738.71 212.53,735.27 213.88,731.91 215.47,728.66 217.28,725.52 219.31,722.52 221.54,719.67 223.96,716.98 ; 209.4,753.01 209.53,756.63 209.9,760.23 210.53,763.79 211.41,767.31 212.53,770.75 213.88,774.11 215.47,777.36 217.28,780.5 219.31,783.5 221.54,786.35 223.96,789.04 ; 212.13,460.19 215.16,462.39 ; 212.13,460.19 215.16,462.39 ; 212.13,549.19 215.16,546.99 ; 212.13,549.19 215.16,546.99 ; 215.16,462.39 218.03,464.8 ; 215.16,462.39 218.03,464.8 ; 215.16,546.99 218.03,544.58 ; 215.16,546.99 218.03,544.58 ; 218.03,464.8 220.72,467.4 ; 218.03,464.8 220.72,467.4 ; 218.03,544.58 220.72,541.98 ; 218.03,544.58 220.72,541.98 ; 220.72,467.4 223.23,470.19 ; 220.72,467.4 223.23,470.19 ; 220.72,541.98 223.23,539.19 ; 220.72,541.98 223.23,539.19 ; 223.23,470.19 225.54,473.14 ; 223.23,470.19 225.54,473.14 ; 223.23,539.19 225.54,536.24 ; 223.23,539.19 225.54,536.24 ; 223.97,293.22 221.55,290.53 219.32,287.68 217.29,284.68 215.48,281.54 213.89,278.29 212.54,274.93 211.42,271.49 210.54,267.97 209.91,264.41 209.54,260.81 209.41,257.19 209.54,253.57 209.91,249.97 210.54,246.41 211.42,242.89 212.54,239.45 213.89,236.09 215.48,232.84 217.29,229.7 219.32,226.7 221.55,223.85 223.97,221.16 226.57,218.64 229.35,216.32 232.27,214.19 235.34,212.27 238.54,210.57 241.85,209.1 245.25,207.86 248.73,206.86 252.27,206.11 255.86,205.6 259.47,205.35 263.09,205.35 266.7,205.6 270.29,206.11 273.83,206.86 277.31,207.86 280.71,209.1 284.02,210.57 287.21,212.27 290.29,214.19 293.21,216.32 295.99,218.64 298.59,221.16 301.01,223.85 303.24,226.7 305.27,229.7 307.08,232.84 308.67,236.09 310.02,239.45 311.14,242.89 312.02,246.41 312.65,249.97 313.02,253.57 313.15,257.19 313.02,260.81 312.65,264.41 312.02,267.97 311.14,271.49 310.02,274.93 308.67,278.29 307.08,281.54 305.27,284.68 303.24,287.68 301.01,290.53 298.59,293.22 295.99,295.74 293.21,298.06 290.29,300.19 287.21,302.11 284.02,303.81 280.71,305.28 277.31,306.52 273.83,307.52 270.29,308.27 266.7,308.78 263.09,309.03 259.47,309.03 255.86,308.78 252.27,308.27 248.73,307.52 245.25,306.52 241.85,305.28 238.54,303.81 235.34,302.11 232.27,300.19 229.35,298.06 226.57,295.74 223.97,293.22 ; 223.96,716.98 226.56,714.46 229.34,712.14 232.26,710.01 235.34,708.09 238.53,706.39 241.84,704.92 245.24,703.68 248.72,702.68 252.26,701.93 255.85,701.42 259.46,701.17 263.08,701.17 266.69,701.42 270.28,701.93 273.82,702.68 277.3,703.68 280.7,704.92 284.01,706.39 287.2,708.09 290.28,710.01 293.2,712.14 295.98,714.46 298.58,716.98 ; 223.96,789.04 226.56,791.56 229.34,793.88 232.26,796.01 235.33,797.93 238.53,799.63 241.84,801.1 245.24,802.34 248.72,803.34 252.26,804.09 255.85,804.6 259.46,804.85 263.08,804.85 266.69,804.6 270.28,804.09 273.82,803.34 277.3,802.34 280.7,801.1 284.01,799.63 287.2,797.93 290.28,796.01 293.2,793.88 295.98,791.56 298.58,789.04 301,786.35 303.23,783.5 305.26,780.5 307.07,777.36 308.66,774.11 310.01,770.75 311.13,767.31 312.01,763.79 312.64,760.23 313.01,756.63 313.14,753.01 ; 225.54,473.14 227.63,476.24 ; 225.54,473.14 227.63,476.24 ; 225.54,536.24 227.63,533.14 ; 225.54,536.24 227.63,533.14 ; 227.63,476.24 229.51,479.49 ; 227.63,476.24 229.51,479.49 ; 227.63,533.14 229.51,529.89 ; 227.63,533.14 229.51,529.89 ; 229.51,479.49 231.15,482.86 ; 229.51,479.49 231.15,482.86 ; 229.51,529.89 231.15,526.52 ; 229.51,529.89 231.15,526.52 ; 231.15,482.86 232.55,486.33 ; 231.15,482.86 232.55,486.33 ; 231.15,526.52 232.55,523.05 ; 231.15,526.52 232.55,523.05 ; 232.55,486.33 233.71,489.89 ; 232.55,486.33 233.71,489.89 ; 232.55,523.05 233.71,519.49 ; 232.55,523.05 233.71,519.49 ; 233.71,489.89 234.62,493.53 ; 233.71,489.89 234.62,493.53 ; 233.71,519.49 234.62,515.85 ; 233.71,519.49 234.62,515.85 ; 234.62,493.53 235.27,497.22 ; 234.62,493.53 235.27,497.22 ; 234.62,515.85 235.27,512.16 ; 234.62,515.85 235.27,512.16 ; 235.27,497.22 235.66,500.95 ; 235.27,497.22 235.66,500.95 ; 235.27,512.16 235.66,508.43 ; 235.27,512.16 235.66,508.43 ; 235.66,500.95 235.79,504.69 ; 235.66,500.95 235.79,504.69 ; 235.66,508.43 235.79,504.69 ; 235.66,508.43 235.79,504.69 ; 298.58,716.98 301,719.67 303.23,722.52 305.26,725.52 307.07,728.66 308.66,731.91 310.01,735.27 311.13,738.71 312.01,742.23 312.64,745.79 313.01,749.39 313.14,753.01 ; 313.14,753.02 404.26,753.02 ; 404.27,753 404.4,749.26 404.79,745.53 405.44,741.84 406.35,738.2 407.51,734.64 408.91,731.17 410.55,727.8 412.43,724.55 414.52,721.45 416.83,718.5 419.34,715.71 422.03,713.11 424.9,710.7 427.93,708.5 ; 404.27,753 404.4,756.74 404.79,760.47 405.44,764.16 406.35,767.8 407.51,771.36 408.91,774.83 410.55,778.2 412.43,781.45 414.52,784.55 416.83,787.5 419.34,790.29 422.03,792.89 424.9,795.3 427.93,797.5 ; 427.93,708.5 431.11,706.51 434.42,704.75 437.84,703.23 441.36,701.95 444.96,700.91 448.63,700.14 452.34,699.61 456.08,699.35 459.82,699.35 463.56,699.61 467.27,700.14 470.94,700.91 474.54,701.95 478.06,703.23 481.48,704.75 484.79,706.51 487.97,708.5 ; 427.93,797.5 431.11,799.49 434.42,801.25 437.84,802.77 441.36,804.05 444.96,805.09 448.63,805.86 452.34,806.39 456.08,806.65 459.82,806.65 463.56,806.39 467.27,805.86 470.94,805.09 474.54,804.05 478.06,802.77 481.48,801.25 484.79,799.49 487.97,797.5 ; 463.97,205.03 467.68,205.56 471.35,206.33 474.95,207.37 478.47,208.65 481.89,210.17 485.2,211.93 488.38,213.92 491.41,216.12 494.28,218.53 496.97,221.13 499.48,223.92 501.79,226.87 503.88,229.97 505.76,233.22 507.4,236.59 508.8,240.06 509.96,243.62 510.87,247.26 511.52,250.95 511.91,254.68 512.04,258.42 511.91,262.16 511.52,265.89 510.87,269.58 509.96,273.22 508.8,276.78 507.4,280.25 505.76,283.62 503.88,286.87 501.79,289.97 499.48,292.92 496.97,295.71 494.28,298.31 491.41,300.72 488.38,302.92 485.2,304.91 481.89,306.67 478.47,308.19 474.95,309.47 471.35,310.51 467.68,311.28 463.97,311.81 ; 463.97,205.03 460.23,204.77 456.49,204.77 452.75,205.03 449.04,205.56 445.37,206.33 441.77,207.37 438.25,208.65 434.83,210.17 431.52,211.93 428.34,213.92 425.31,216.12 422.44,218.53 419.75,221.13 417.24,223.92 414.93,226.87 412.84,229.97 410.96,233.22 409.32,236.59 407.92,240.06 406.76,243.62 405.85,247.26 405.2,250.95 404.81,254.68 404.68,258.42 404.81,262.16 405.2,265.89 405.85,269.58 406.76,273.22 407.92,276.78 409.32,280.25 410.96,283.62 412.84,286.87 414.93,289.97 417.24,292.92 419.75,295.71 422.44,298.31 425.31,300.72 428.34,302.92 431.52,304.91 434.83,306.67 438.25,308.19 441.77,309.47 445.37,310.51 449.04,311.28 452.75,311.81 456.49,312.07 460.23,312.07 463.97,311.81 ; 482.39,505.5 482.52,501.76 ; 482.39,505.5 482.52,509.24 ; 482.39,505.5 482.52,501.76 ; 482.39,505.5 482.52,509.24 ; 482.52,501.76 482.91,498.03 ; 482.52,501.76 482.91,498.03 ; 482.52,509.24 482.91,512.97 ; 482.52,509.24 482.91,512.97 ; 482.91,498.03 483.56,494.34 ; 482.91,498.03 483.56,494.34 ; 482.91,512.97 483.56,516.66 ; 482.91,512.97 483.56,516.66 ; 483.56,494.34 484.47,490.7 ; 483.56,494.34 484.47,490.7 ; 483.56,516.66 484.47,520.3 ; 483.56,516.66 484.47,520.3 ; 484.47,490.7 485.63,487.14 ; 484.47,490.7 485.63,487.14 ; 484.47,520.3 485.63,523.86 ; 484.47,520.3 485.63,523.86 ; 485.63,487.14 487.03,483.67 ; 485.63,487.14 487.03,483.67 ; 485.63,523.86 487.03,527.33 ; 485.63,523.86 487.03,527.33 ; 487.03,483.67 488.67,480.3 ; 487.03,483.67 488.67,480.3 ; 487.03,527.33 488.67,530.7 ; 487.03,527.33 488.67,530.7 ; 487.97,708.5 491,710.7 493.87,713.11 496.56,715.71 499.07,718.5 501.38,721.45 503.47,724.55 505.35,727.8 506.99,731.17 508.39,734.64 509.55,738.2 510.46,741.84 511.11,745.53 511.5,749.26 511.63,753 ; 487.97,797.5 491,795.3 493.87,792.89 496.56,790.29 499.07,787.5 501.38,784.55 503.47,781.45 505.35,778.2 506.99,774.83 508.39,771.36 509.55,767.8 510.46,764.16 511.11,760.47 511.5,756.74 511.63,753 ; 488.67,480.3 490.55,477.05 ; 488.67,480.3 490.55,477.05 ; 488.67,530.7 490.55,533.95 ; 488.67,530.7 490.55,533.95 ; 490.55,477.05 492.64,473.95 ; 490.55,477.05 492.64,473.95 ; 490.55,533.95 492.64,537.05 ; 490.55,533.95 492.64,537.05 ; 492.64,473.95 494.95,471 ; 492.64,473.95 494.95,471 ; 492.64,537.05 494.95,540 ; 492.64,537.05 494.95,540 ; 494.95,471 497.46,468.21 ; 494.95,471 497.46,468.21 ; 494.95,540 497.46,542.79 ; 494.95,540 497.46,542.79 ; 497.46,468.21 500.15,465.61 ; 497.46,468.21 500.15,465.61 ; 497.46,542.79 500.15,545.39 ; 497.46,542.79 500.15,545.39 ; 500.15,465.61 503.02,463.2 ; 500.15,465.61 503.02,463.2 ; 500.15,545.39 503.02,547.8 ; 500.15,545.39 503.02,547.8 ; 503.02,463.2 506.05,461 ; 503.02,463.2 506.05,461 ; 503.02,547.8 506.05,550 ; 503.02,547.8 506.05,550 ; 506.05,461 509.23,459.01 ; 506.05,461 509.23,459.01 ; 506.05,550 509.23,551.99 ; 506.05,550 509.23,551.99 ; 509.23,459.01 512.54,457.25 ; 509.23,459.01 512.54,457.25 ; 509.23,551.99 512.54,553.75 ; 509.23,551.99 512.54,553.75 ; 512.54,457.25 515.96,455.73 ; 512.54,457.25 515.96,455.73 ; 512.54,553.75 515.96,555.27 ; 512.54,553.75 515.96,555.27 ; 515.96,455.73 519.48,454.45 ; 515.96,455.73 519.48,454.45 ; 515.96,555.27 519.48,556.55 ; 515.96,555.27 519.48,556.55 ; 519.48,454.45 523.08,453.41 ; 519.48,454.45 523.08,453.41 ; 519.48,556.55 523.08,557.59 ; 519.48,556.55 523.08,557.59 ; 523.08,453.41 526.75,452.64 ; 523.08,453.41 526.75,452.64 ; 523.08,557.59 526.75,558.36 ; 523.08,557.59 526.75,558.36 ; 526.75,452.64 530.46,452.11 ; 526.75,452.64 530.46,452.11 ; 526.75,558.36 530.46,558.89 ; 526.75,558.36 530.46,558.89 ; 530.46,452.11 534.2,451.85 ; 530.46,452.11 534.2,451.85 ; 530.46,558.89 534.2,559.15 ; 530.46,558.89 534.2,559.15 ; 534.2,451.85 537.94,451.85 ; 534.2,451.85 537.94,451.85 ; 534.2,559.15 537.94,559.15 ; 534.2,559.15 537.94,559.15 ; 537.94,451.85 541.68,452.11 ; 537.94,451.85 541.68,452.11 ; 537.94,559.15 541.68,558.89 ; 537.94,559.15 541.68,558.89 ; 541.68,452.11 545.39,452.64 ; 541.68,452.11 545.39,452.64 ; 541.68,558.89 545.39,558.36 ; 541.68,558.89 545.39,558.36 ; 545.39,452.64 549.06,453.41 ; 545.39,452.64 549.06,453.41 ; 545.39,558.36 549.06,557.59 ; 545.39,558.36 549.06,557.59 ; 549.06,453.41 552.66,454.45 ; 549.06,453.41 552.66,454.45 ; 549.06,557.59 552.66,556.55 ; 549.06,557.59 552.66,556.55 ; 552.66,454.45 556.18,455.73 ; 552.66,454.45 556.18,455.73 ; 552.66,556.55 556.18,555.27 ; 552.66,556.55 556.18,555.27 ; 556.18,455.73 559.6,457.25 ; 556.18,455.73 559.6,457.25 ; 556.18,555.27 559.6,553.75 ; 556.18,555.27 559.6,553.75 ; 559.6,457.25 562.91,459.01 ; 559.6,457.25 562.91,459.01 ; 559.6,553.75 562.91,551.99 ; 559.6,553.75 562.91,551.99 ; 562.91,459.01 566.09,461 ; 562.91,459.01 566.09,461 ; 562.91,551.99 566.09,550 ; 562.91,551.99 566.09,550 ; 566.09,461 569.12,463.2 ; 566.09,461 569.12,463.2 ; 566.09,550 569.12,547.8 ; 566.09,550 569.12,547.8 ; 569.12,463.2 571.99,465.61 ; 569.12,463.2 571.99,465.61 ; 569.12,547.8 571.99,545.39 ; 569.12,547.8 571.99,545.39 ; 571.99,465.61 574.68,468.21 ; 571.99,465.61 574.68,468.21 ; 571.99,545.39 574.68,542.79 ; 571.99,545.39 574.68,542.79 ; 574.68,468.21 577.19,471 ; 574.68,468.21 577.19,471 ; 574.68,542.79 577.19,540 ; 574.68,542.79 577.19,540 ; 577.19,471 579.5,473.95 ; 577.19,471 579.5,473.95 ; 577.19,540 579.5,537.05 ; 577.19,540 579.5,537.05 ; 579.5,473.95 581.59,477.05 ; 579.5,473.95 581.59,477.05 ; 579.5,537.05 581.59,533.95 ; 579.5,537.05 581.59,533.95 ; 581.59,477.05 583.47,480.3 ; 581.59,477.05 583.47,480.3 ; 581.59,533.95 583.47,530.7 ; 581.59,533.95 583.47,530.7 ; 583.47,480.3 585.11,483.67 ; 583.47,480.3 585.11,483.67 ; 583.47,530.7 585.11,527.33 ; 583.47,530.7 585.11,527.33 ; 585.11,483.67 586.51,487.14 ; 585.11,483.67 586.51,487.14 ; 585.11,527.33 586.51,523.86 ; 585.11,527.33 586.51,523.86 ; 586.51,487.14 587.67,490.7 ; 586.51,487.14 587.67,490.7 ; 586.51,523.86 587.67,520.3 ; 586.51,523.86 587.67,520.3 ; 587.67,490.7 588.58,494.34 ; 587.67,490.7 588.58,494.34 ; 587.67,520.3 588.58,516.66 ; 587.67,520.3 588.58,516.66 ; 588.58,494.34 589.23,498.03 ; 588.58,494.34 589.23,498.03 ; 588.58,516.66 589.23,512.97 ; 588.58,516.66 589.23,512.97 ; 589.23,498.03 589.62,501.76 ; 589.23,498.03 589.62,501.76 ; 589.23,512.97 589.62,509.24 ; 589.23,512.97 589.62,509.24 ; 589.62,501.76 589.75,505.5 ; 589.62,501.76 589.75,505.5 ; 589.62,509.24 589.75,505.5 ; 589.62,509.24 589.75,505.5